# Altium PCB MLX90640_PCB.PcbDoc
Units mm, origin at the board's own origin, x right, y up, seen from the top; angles counter-clockwise.
Board outline 21 x 20.13 mm, 2 copper layers (Top Layer, Bottom Layer); 22 components, 16 nets, 108 pads, 40 vias.
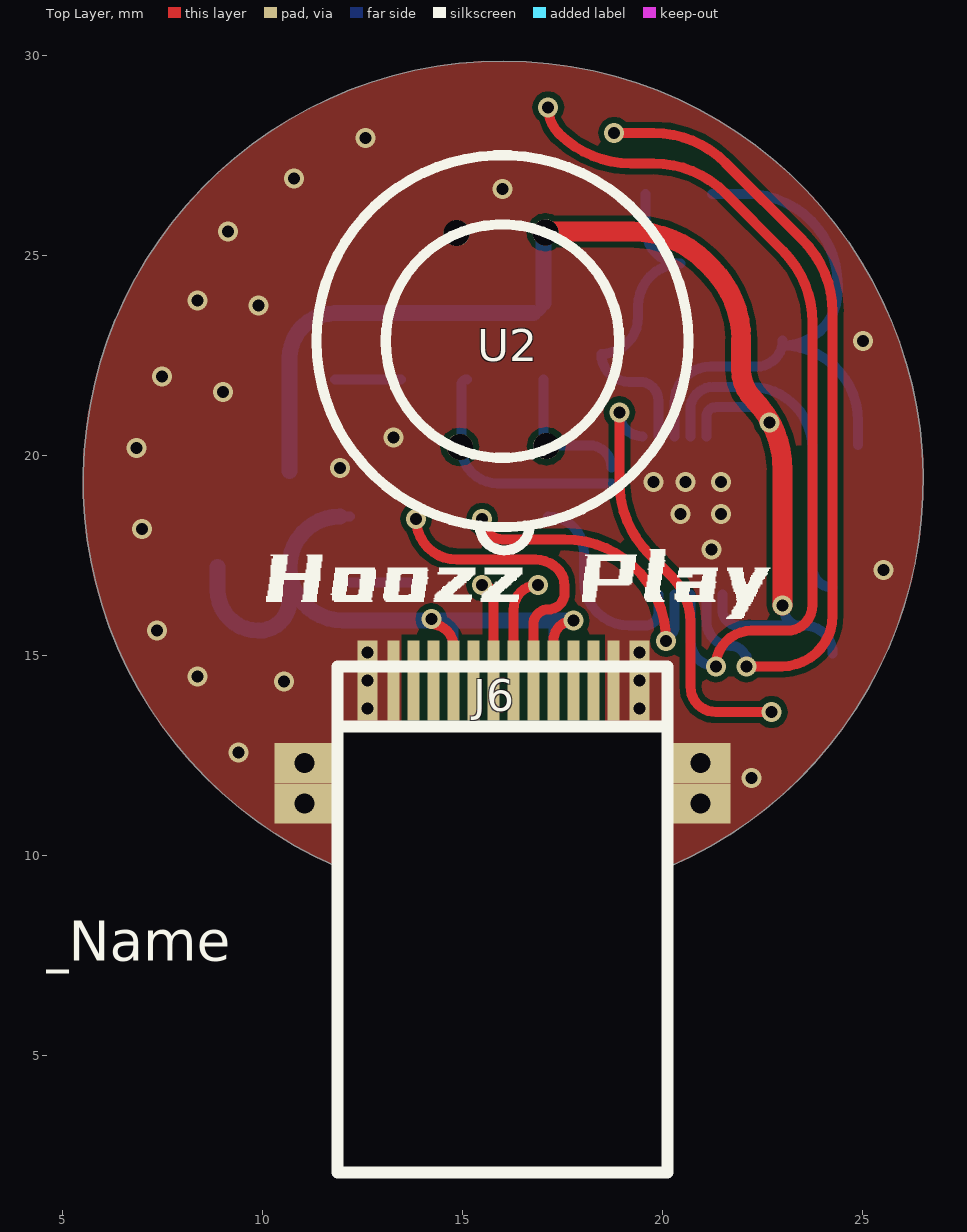
[diagram p0: Top Layer view]
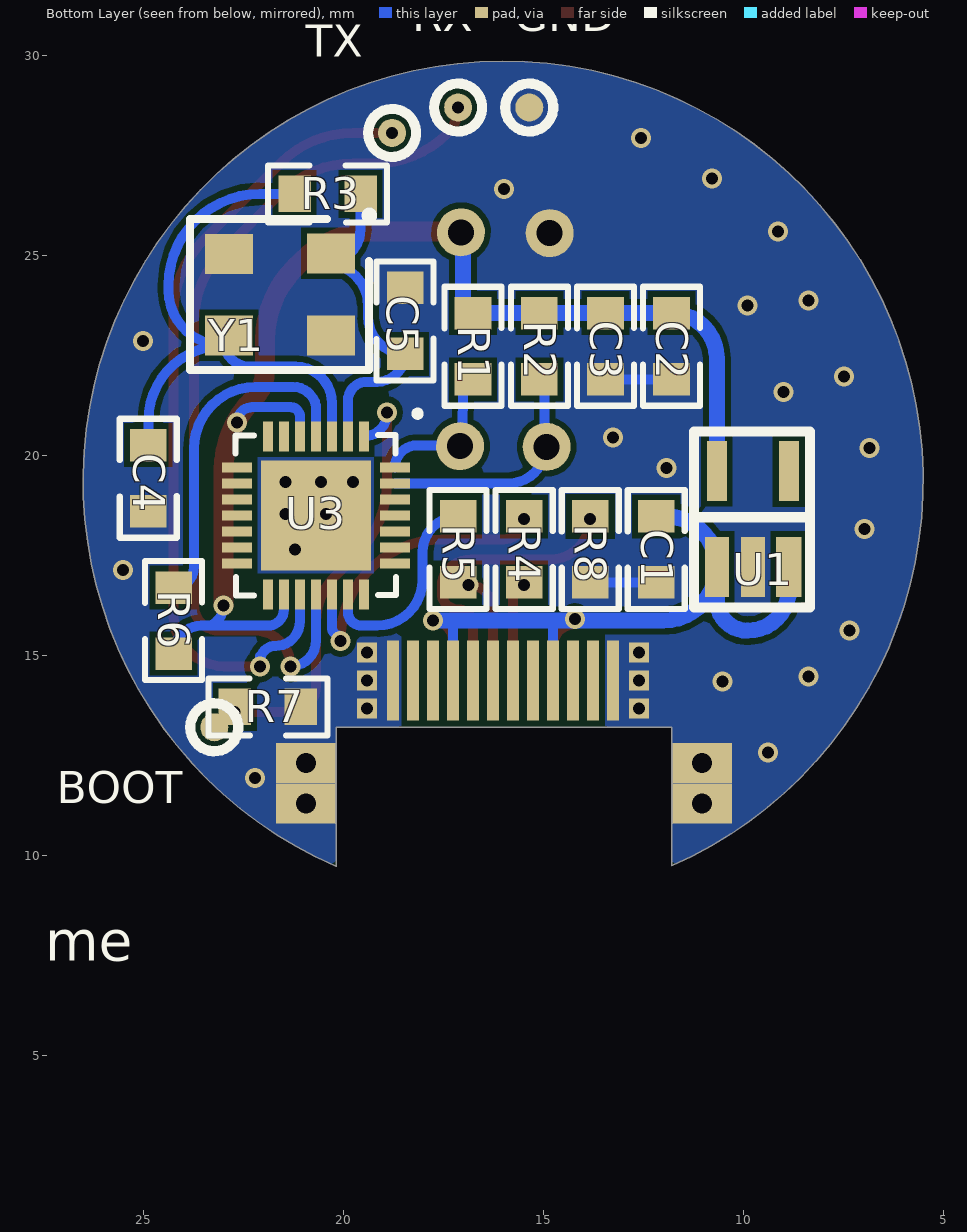
[diagram p1: Bottom Layer view, seen from below]

## Layer stack, top to bottom
Top Solder: solder mask 0.0102, Solder Resist, Dk 3.5
Top Layer: signal copper 0.0356
Dielectric 1: dielectric 0.32, FR-4, Dk 4.8
Bottom Layer: signal copper 0.0356
Bottom Solder: solder mask 0.0102, Solder Resist, Dk 3.5

## Board outline
11.811,9.744 cw(c16.02,19.364) 20.196,9.73 20.193,9.737 20.193,13.208 11.811,13.208

## Design rules (kind name [scope] priority, off if disabled: settings)
Clearance [All] p1: gap=0.15 ignorepadtopadclearanceinfootprint=TRUE
ComponentClearance [All] p1: gap=0 collisioncheckmode=3 verticalgap=0 showdistances=FALSE
PlaneConnect [All] p1: planeconnectstyle=Direct reliefexpansion=0.508 reliefentries=4 reliefconductorwidth=0.254 reliefairgap=0.254
PolygonConnect [All] p1: connectstyle=Direct reliefconductorwidth=0.254 reliefentries=4 polygonreliefangle="90 Angle" airgapwidth=0.254
RoutingVias [All] p1: holewidth=0.5 width=0.5 viastyle="Through Hole" minholewidth=0.3 minwidth=0.4 maxholewidth=0.3 maxwidth=0.6
SolderMaskExpansion [All] p1: expansion=0.102
Width [All] p1: maxlimit=0.5 minlimit=0.2 preferedwidth=0.25
28 further rules are at their usual default settings.

## Components (designator, comment, footprint, x,y, rotation, side; value= is the part's Value field where it differs from the comment)
BOOT "TEST-PORT" TEST-PORT 23.241,13.208 r90 bottom
C1 "Cap" 0603 12.192,17.653 r90 bottom value=1uF
C2 "Cap" 0603 11.811,22.733 r90 bottom value=1uF
C3 "Cap" 0603 13.462,22.733 r90 bottom value=100nF
C4 "Cap" 0603 24.892,19.434 r270 bottom value=20pF
C5 "Cap" 0603 18.472,23.368 r270 bottom value=20pF
GND "TEST-PORT" TEST-PORT 15.367,28.702 r90 bottom
J6 "Type_C-24P" Type_C-24P-A 16.048,8.382 r0 top
R1 "Res" 0603 16.773,22.733 r90 bottom value=1K
R2 "Res" 0603 15.113,22.733 r90 bottom value=1K
R3 "Res" 0603 20.409,26.543 r180 bottom value=1M
R4 "Res" 0603 15.494,17.653 r270 bottom value=22R
R5 "Res" 0603 17.145,17.653 r270 bottom value=22R
R6 "Res" 0603 24.257,15.875 r90 bottom value=10K
R7 "Res" 0603 21.901,13.716 r0 bottom value=10K
R8 "Res" 0603 13.843,17.653 r90 bottom value=5.1K
RX "TEST-PORT" TEST-PORT 17.145,28.702 r180 bottom
TX "TEST-PORT" TEST-PORT 18.796,28.067 r180 bottom
U1 "ME6211-3.3" SOT-23-5 9.779,18.415 r180 bottom
U2 "MLX90640" MLX90640 16.002,22.86 r338 top
U3 "GD32F350G8U6TR" QFN28_4X4X0.8 20.701,18.507 r270 bottom
Y1 "8MHz" 3225 21.59,24.003 r0 bottom

## Footprints (in the part's own frame and the unit in brackets; to place one, negate y for a bottom-side part, rotate by r counter-clockwise, add the part's x,y. Pads: shape width x height; smd on the part's side, far side on the other; paste and mask are expansions set on the pad)
0603 [mil]
  rect 32x36 smd: 1(-32.5,0) 2(32.5,0)
  silkscreen extent -59,-28 59,28
3225 [mm]
  rect 1.2x1 smd: 1(-1.26,-1.05) 2(1.29,-1.04) 3(1.29,1) 4(-1.26,1)
  silkscreen extent -2.32,-2.09 2.26,1.86
MLX90640 [mm] "MLX90640"
  round 0.65 / inner round 1.2 / far side round 1.2 hole 0.65: 1(-0.025,2.925) 2(-2.075,2.075) 3(0,-2.85) 4(2,-2.025)
  silkscreen extent -4.65,-4.87 4.65,4.65
QFN28_4X4X0.8 [mm]
  rect 2.75x2.75 smd: 0(0,0)
  rect 0.75x0.25 smd: 1(-1.975,1.2) 2(-1.975,0.8) 3(-1.975,0.4) 4(-1.975,0) 5(-1.975,-0.4) 6(-1.975,-0.8) 7(-1.975,-1.2) 15(1.975,-1.2) 16(1.975,-0.8) 17(1.975,-0.4) 18(1.975,0) 19(1.975,0.4) 20(1.975,0.8) 21(1.975,1.2)
  rect 0.25x0.75 smd: 8(-1.2,-1.975) 9(-0.8,-1.975) 10(-0.4,-1.975) 11(0,-1.975) 12(0.4,-1.975) 13(0.8,-1.975) 14(1.2,-1.975) 22(1.2,1.975) 23(0.8,1.975) 24(0.4,1.975) 25(0,1.975) 26(-0.4,1.975) 27(-0.8,1.975) 28(-1.2,1.975)
  silkscreen extent -2.62,-2.01 2.01,2.62, body extent -2.05,-2.05 2.05,2.05, height 0.8
SOT-23-5 [mm]
  rect 0.6x1.5 smd: 1(-0.9,-1.2) 2(0,-1.2)
  rect 0.63x1.5 smd: 3(0.9,-1.2)
  rect 0.5x1.5 smd: 4(0.9,1.2) 5(-0.9,1.2)
  silkscreen extent -1.47,-2.21 1.43,2.18
TEST-PORT [mm] "Test port"
  round 0.7 smd: T(0,0)
  silkscreen extent -0.6,-0.6 0.6,0.6
Type_C-24P-A [mm] "Type_C-24P"
  rect 0.3x2 smd: A1(2.725,6) A2(2.225,6) A3(1.725,6) A4(1.225,6) A5(0.725,6) A6(0.225,6) A7(-0.275,6) A8(-0.775,6) A9(-1.275,6) A10(-1.775,6) A11(-2.275,6) A12(-2.775,6)
  rect 0.3x2 smd far side: B1(-2.775,6) B2(-2.275,6) B3(-1.775,6) B4(-1.275,6) B5(-0.775,6) B6(-0.275,6) B7(0.225,6) B8(0.725,6) B9(1.225,6) B10(1.725,6) B11(2.225,6) B12(2.725,6)
  rect 0.5x0.5 hole 0.3: ""(-3.425,5.3) ""(-3.425,6) ""(-3.425,6.7) ""(3.375,5.3) ""(3.375,6) ""(3.375,6.7)
  rect 0.5x2 smd: ""(-3.425,6) ""(3.375,6)
  silkscreen extent -4.18,-6.3 4.07,6.35

## Part data
C1 C2 C3 C4 C5: "Capacitor", LatestRevisionDate=17-Jul-2002, LatestRevisionNote="Re-released for DXP Platform.", PackageDescription="Radial Cap, Thru-Hole; 2 Leads; 0.3 in Pin Spacing", PackageReference=RAD-0.3, Published=8-Jun-2000, Publisher="Altium Limited"
J6: "USB Type C"
R1 R2 R3 R4 R5 R6 R7 R8: "Resistor", LatestRevisionDate=29-May-2009, LatestRevisionNote="IPC-7351 Footprint Added.", PackageDescription="Chip Resistor", PackageReference=J1-0603, Published=8-Jun-2000, Publisher="Altium Limited"
U1: "No Description Available", Manufacturer="Texas Instruments", Manufacturer_Part_Number=REG102NA-2.5/250, Built_By=EMA_UL_Team, Copyright="Copyright (C) 2018 Accelerated Designs. All rights reserved", RefDes=RefDes, SourceLibrary=TI_2016-07-06, Type=DEV, Vendor="Texas Instruments"
U3: library part GD32F350GxUx
Y1: library part XTAL2

## Free pads (board coordinates)
  rect 1.5x1 hole 0.5: ""(11.049,11.303) ""(11.049,12.319) ""(20.955,11.303) ""(20.955,12.319)

## Via types
v1: diameter 0.5, hole 0.3, Top Layer to Bottom Layer, 40 vias

## Nets (pads, with @x,y where several pads share a name; then routed paths per layer and width w, separated by ;. In a path a pad name is that pad's centre, name@x,y a point inside that pad or via, vN(x,y) a via of type N, cw(c..) or ccw(c..) an arc to the next point about the centre after c; other vN are vias at no path point)
BOOT0: BOOT.T R7.2 U3.1 | length 10.7
  Top Layer w0.25: v1(18.923,21.082) 18.923,19.34 ccw(c21.463,19.34) 19.667,17.544 20.215,16.996 cw(c19.041,15.822) 20.701,15.822 20.701,14.224 ccw(c21.336,14.224) 21.336,13.589 v1(22.733,13.589)
  Bottom Layer w0.25: v1(18.923,21.082) 18.923,21.06 ccw(c19.501,21.06) U3.1
GND: C1.1 C2.1 C3.1 C4.2 C5.1 GND.T J6. J6.A1 J6.A12 J6.B1 J6.B12 pad. R7.1 R8.1 U1.2 U2.2 U3.0 Y1.2 Y1.4 | length 3.3
  Bottom Layer w0.25: C2.1 C3.1 ; C1.1 R8.1
  other v1: 22.225,11.938 9.398,12.573 10.541,14.351 8.382,14.478 7.366,15.621 25.527,17.145 21.227,17.653 6.985,18.161 20.447,18.542 21.463,18.542 19.776,19.34 20.574,19.34 21.463,19.34 11.938,19.685 6.858,20.193 13.273,20.447 9.017,21.59 7.493,21.971 25.019,22.86 9.906,23.749 8.382,23.876 9.144,25.6 16.002,26.67 10.795,26.924 12.573,27.94
I2C0_SCL: R2.1 U2.3 U3.27 | length 6
  Bottom Layer w0.25: R2.1 ccw(c15.113,21.775) 14.981,21.775 14.981,20.199 ccw(c15.873,20.199) 15.873,19.307 U3.27
I2C0_SDA: R1.1 U2.4 U3.28 | length 3.5
  Bottom Layer w0.25: R1.1@17.027,21.907 U2.4@17.031,20.32 ; U2.4@17.143,20.253 18.18,20.253 cw(c18.18,19.707) U3.28
NetJ6_A5: J6.A5 R8.2 | length 7.5
  Top Layer w0.25: v1(13.843,18.415) ccw(c14.859,18.415) 14.859,17.399 16.828,17.399 cw(c16.828,16.623) 17.377,17.172 cw(c16.957,16.751) 17.552,16.751 17.552,16.558 cw(c17.145,16.558) 17.145,16.152 ccw(c17.145,15.784) 16.777,15.784 J6.A5@16.777,14.382
NetR4_1: R4.1 U3.19 | length 7.5
  Top Layer w0.25: v1(15.494,18.415) ccw(c16.002,18.415) 16.002,17.907 17.552,17.907 cw(c17.552,15.367) v1(20.092,15.367)
  Bottom Layer w0.25: v1@20.092,15.494 ccw(c20.092,15.703) 20.301,15.703 U3.19
NetR5_1: R5.1 U3.20 | length 5.3
  Bottom Layer w0.25: R5.1 cw(c17.145,17.59) 18.034,17.59 18.034,16.891 ccw(c19.177,16.891) 19.177,15.748 19.558,15.748 ccw(c19.558,16.091) 19.901,16.091 U3.20
NRST: R6.2 U3.4 | length 8.7
  Bottom Layer w0.25: U3.4 20.701,21.252 cw(c21.274,21.132) 21.274,21.717 22.206,21.717 cw(c22.206,20.174) 23.749,20.174 23.749,17.209 ccw(c24.257,17.209) R6.2
OSC_IN: C5.2 R3.2 U3.2 Y1.1 | length 8.6
  Bottom Layer w0.25: R3.2 19.584,25.672 ccw(c20.457,25.672) 20.457,24.799 ccw(c20.457,23.735) 19.393,23.735 19.393,23.464 cw(c18.472,23.464) C5.2 ccw(c19.17,22.543) 19.17,21.844 19.431,21.844 cw(c19.431,21.374) 19.901,21.374 U3.2
OSC_OUT: C4.1 R3.1 U3.3 Y1.3 | length 14.7
  Bottom Layer w0.25: U3.3 20.301,21.317 cw(c21.209,21.317) 21.209,22.225 22.356,22.225 ccw(c22.356,22.876) Y1.3@23.007,22.876 ; R3.1 22.098,26.543 cw(c22.098,24.257) 24.384,24.257 24.384,24.126 cw(c23.007,24.126) 23.007,22.749 cw(c23.007,20.864) 24.892,20.864 C4.1
USART0_RX: RX.T U3.18 | length 21.8
  Top Layer w0.25: v1(17.145,28.702) ccw(c18.065,28.702) 17.414,28.052 17.417,28.049 ccw(c19.213,29.845) 19.213,27.305 19.776,27.305 cw(c19.776,24.765) 21.572,26.561 23.005,25.128 cw(c21.209,23.332) 23.749,23.332 23.749,16.256 cw(c23.114,16.256) 23.114,15.621 22.225,15.621 ccw(c22.225,14.732) v1(21.336,14.732)
  Bottom Layer w0.25: U3.18 20.701,15.367 ccw(c21.336,15.367) v1(21.336,14.732)
USART0_TX: TX.T U3.17 | length 20.7
  Top Layer w0.25: v1(18.796,28.067) 19.776,28.067 cw(c19.776,25.527) 21.572,27.323 23.513,25.382 cw(c21.717,23.586) 24.257,23.586 24.257,16.002 cw(c22.987,16.002) 22.987,14.732 v1(22.098,14.732)
  Bottom Layer w0.25: U3.17 21.101,15.856 ccw(c21.717,15.856) 21.717,15.24 cw(c21.717,14.859) v1@22.098,14.859 ; v1(22.098,14.732) v1@22.098,14.859 ; 22.098,14.986 v1@22.098,14.859
USB_D+: J6.A6 R5.2 | length 2.7
  Top Layer w0.25: J6.A6@16.277,14.382 16.277,16.152 cw(c16.889,16.152) v1(16.889,16.764)
USB_D-: J6.A7 R4.2 | length 2.5
  Top Layer w0.25: v1(15.494,16.764) cw(c15.494,16.481) 15.777,16.481 J6.A7@15.777,14.382
VDD3V3: C2.2 C3.2 R1.2 R2.2 R6.1 U1.5 U2.1 U3.5 U3.16 | length 31.9
  Top Layer w0.5: U2.1@17.027,25.6 19.268,25.6 cw(c19.268,23.06) 21.064,24.856 21.227,24.693 cw(c19.431,22.897) 21.971,22.897 21.971,22.13 ccw(c22.968,22.13) 22.263,21.425 cw(c20.467,19.629) 23.007,19.629 v1(23.007,16.256)
  Bottom Layer w0.25: R1.2 ccw(c16.773,23.812) R1.2@17.027,23.812 ; U3.5 21.101,20.974 cw(c21.336,20.974) 21.336,21.209 22.295,21.209 cw(c22.295,20.828) v1(22.676,20.828) ; U3.16 21.501,16.148 ccw(c21.901,16.148) 21.901,15.748 23.342,15.748 ; v1(23.007,16.256) ccw(c23.56,16.256) 23.342,15.748 ; R6.1 ccw(c23.558,15.05) 23.558,15.748 23.342,15.748
  Bottom Layer w0.4: U1.5 10.679,22.427 cw(c11.811,22.427) C2.2 C3.2 R2.2 R1.2 ; R1.2@17.027,23.812 U2.1@17.027,25.6
VDD5V: C1.2 J6.A4 J6.A9 J6.B4 J6.B9 U1.1 U1.3 | length 20.8
  Top Layer w0.25: v1@14.224,15.784 cw(c14.224,15.231) 14.777,15.231 J6.A9@14.777,14.382 ; J6.A4@17.277,14.382 17.277,15.372 cw(c17.78,15.372) v1(17.78,15.875)
  Bottom Layer w0.25: C1.2@11.943,18.479 C1.2 ; 14.732,15.875 cw(c14.732,15.83) 14.777,15.83 J6.B4@14.777,14.382 ; 17.272,15.875 17.277,15.875 J6.B9@17.277,14.382
  Bottom Layer w0.4: U1.3 8.879,16.648 ccw(c9.906,16.648) 9.906,15.621 ccw(c9.906,16.394) 10.679,16.394 U1.1 ; C1.2@11.943,18.479 ccw(c11.943,17.215) U1.1 ; 17.272,15.875 14.732,15.875 12.019,15.875 cw(c12.019,17.215) U1.1 ; 17.277,15.875 v1(17.78,15.875)
  other v1: 14.224,15.911
pads on no net: J6.A2 J6.A3 J6.A8 J6.A10 J6.A11 J6.B2 J6.B3 J6.B5 J6.B6 J6.B7 J6.B8 J6.B10 J6.B11 U1.4 U3.6 U3.7 U3.8 U3.9 U3.10 U3.11 U3.12 U3.13 U3.14 U3.15 U3.21 U3.22 U3.23 U3.24 U3.25 U3.26

## Polygon pours and split planes (outlines as drawn)
GND on Top Layer "GND_L01_P013" (solid, remove dead copper, pour order 13): 11.811,9.744 cw(c16.02,19.364) 20.196,9.73 20.193,9.737 20.193,13.208 11.811,13.208
GND on Bottom Layer "GND_L02_P014" (solid, remove dead copper, pour order 14): 11.811,9.744 cw(c16.02,19.364) 20.196,9.73 20.193,9.737 20.193,13.208 11.811,13.208

## Silkscreen, mask and mechanical layers (free items; w line width, h text height)
Top Overlay:
  drawing of 9 lines, arcs and shapes, not listed
  text ".Layer_Name" at 0.2,7.366 h1
Bottom Overlay:
  text ".Layer_Name" at 34.29,7.366 h1
Mechanical 1:
  lines w0.254: 11.811,9.744 cw(c16.02,19.364) 20.196,9.73
  lines w0.3: 11.811,9.744 11.811,13.208 20.193,13.208 20.193,9.737